# Altium PCB RLCD_SCH_28LED_v1p13p2.PcbDoc
Units mil, origin at the board's own origin, x right, y up, seen from the top; angles counter-clockwise.
Board outline 3898 x 1654 mil, 2 copper layers (Top, Bottom), stack 61.811 mil thick; 70 components, 76 nets, 264 pads, 83 vias.
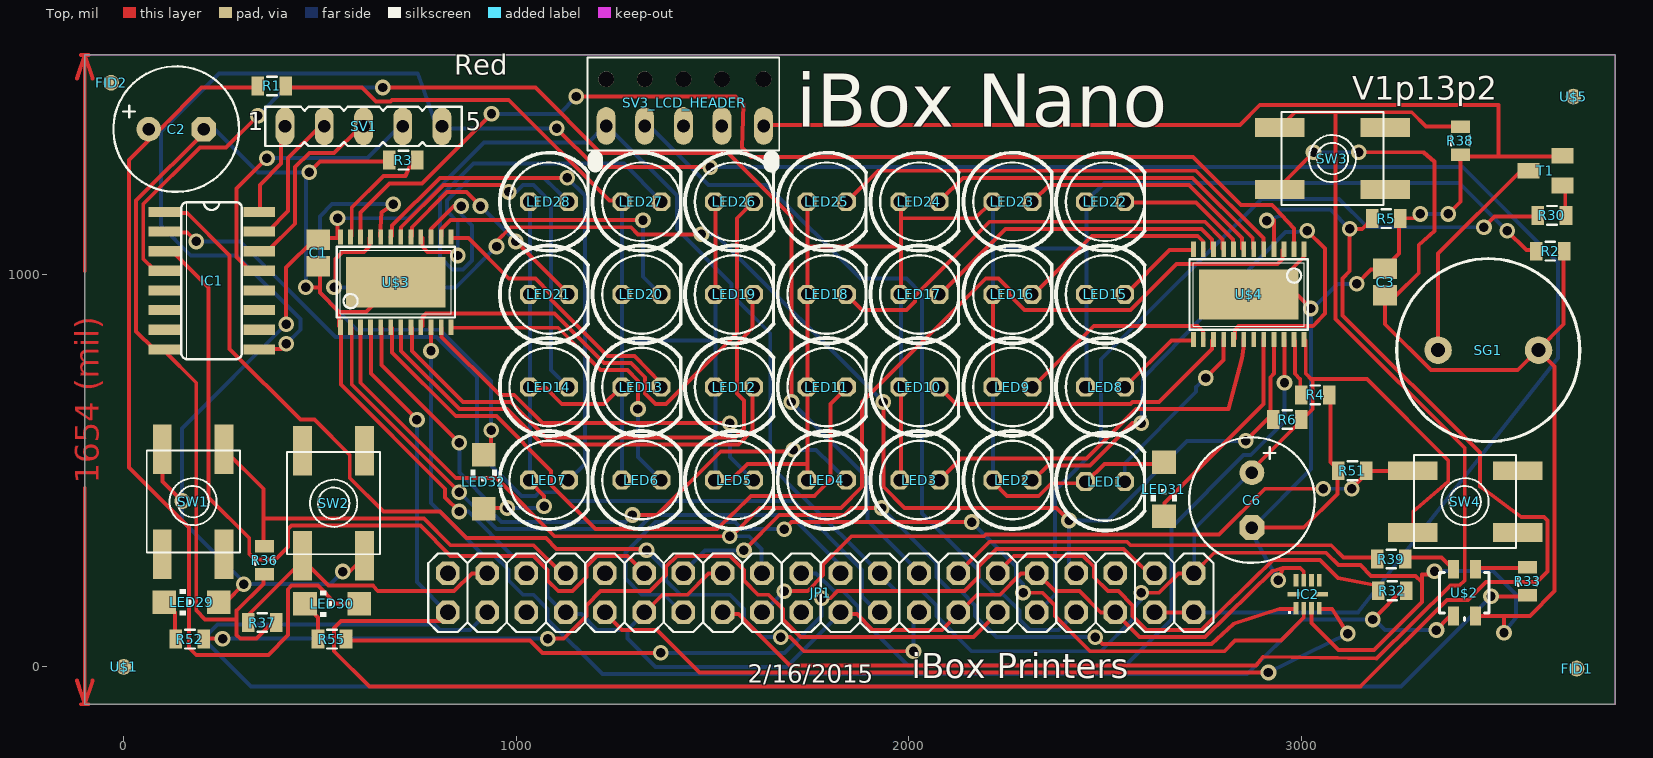
[diagram p0: Top view]
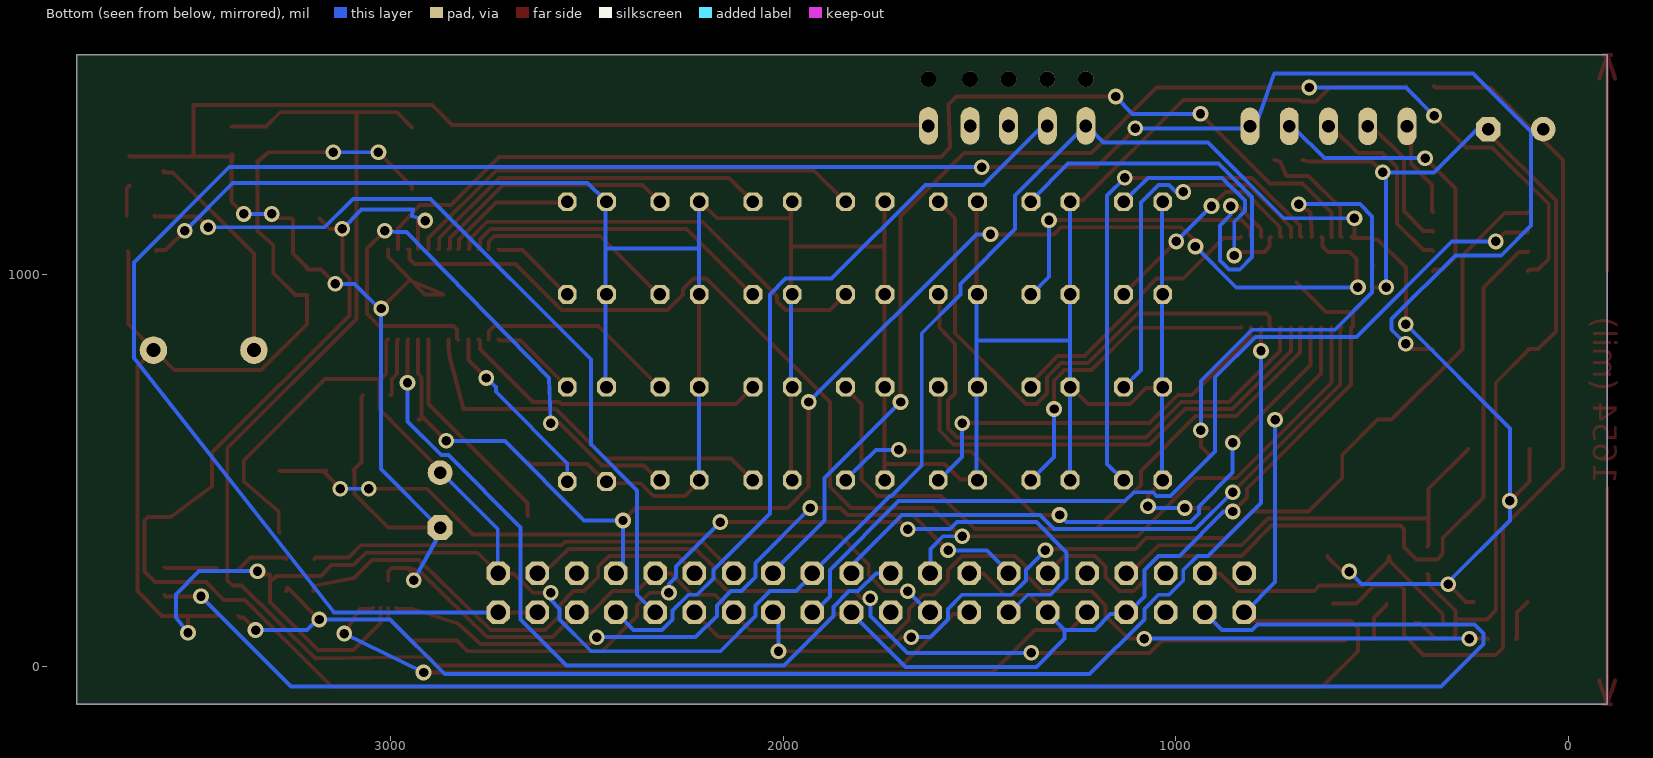
[diagram p1: Bottom view, seen from below]

## Layer stack, top to bottom
Top Solder: solder mask 0.4, Solder Resist, Dk 3.5
Top: signal copper 1.378
Dielectric 1: core 59.0551, FR-4, Dk 4.8
Bottom: signal copper 1.378
Bottom Solder: solder mask 0.4, Solder Resist, Dk 3.5

## Board outline
-99,-95 3799,-95 3799,1559 -99,1559

## Design rules (kind name [scope] priority, off if disabled: settings)
Clearance mdViaVia [IsVia vs IsVia] p1: gap=8
Clearance mdPadVia [IsPad vs IsVia] p2: gap=8
Clearance mdPadPad [IsPad vs IsPad] p3: gap=8
Clearance mdWireVia [(InLayerClass('Signal Layers') AND IsTrack) vs IsVia] p4: gap=8
Clearance mdWirePad [(InLayerClass('Signal Layers') AND IsTrack) vs IsPad] p5: gap=8
Clearance mdWireWire [(InLayerClass('Signal Layers') AND IsTrack) vs (InLayerClass('Signal Layers') AND IsTrack)] p6: gap=8
Clearance [All] p7: gap=8
HoleSize [All] p1: absolutevalues=TRUE maxlimit=100000 minlimit=24 maxpercent=80.000 minpercent=20.000
HoleToHoleClearance [All] p1: gap=8 allowstackedmicrovias=TRUE
PolygonConnect ThermalVias [IsVia] p1: connectstyle=Direct reliefconductorwidth=10 reliefentries=4 polygonreliefangle="90 Angle" airgapwidth=10
PolygonConnect [All] p2: connectstyle=Relief reliefconductorwidth=10 reliefentries=4 polygonreliefangle="90 Angle" airgapwidth=10
RoutingVias [All] p1: holewidth=28 width=50 viastyle="Through Hole" minholewidth=28 minwidth=50 maxholewidth=28 maxwidth=50
SilkToSilkClearance [All] p1 off: silktosilkclearance=10
SilkToSolderMaskClearance [IsPad] p1 off: minsilkscreentomaskgap=10 clearancetoexposedcopper=TRUE
SolderMaskExpansion [All] p1: expansion=4
Width [All] p1: maxlimit=100000 minlimit=10 preferedwidth=10
26 further rules are at their usual default settings.

## Components (designator, comment, footprint, x,y, rotation, side; value= is the part's Value field where it differs from the comment)
C1 "" C0805 496,1055 r270 top
C2 "" E3,5-8 134,1370 r0 top
C3 "" C0805 3213,980 r90 top
C6 "" E3,5-8 2874,425 r270 top
FID1 "" FIDUCIAL-1X2 3701,-4 r0 top
FID2 "" FIDUCIAL-1X2 -32,1488 r0 top
IC1 "" SO16 224,984 r270 top
IC2 "" QFN-10 3016,185 r90 top
JP1 "" 2X20 1776,189 r180 top
LED1 "" LED5MM 2500,472 r0 top
LED2 "" LED5MM 2264,476 r0 top
LED3 "" LED5MM 2027,476 r0 top
LED4 "" LED5MM 1791,476 r0 top
LED5 "" LED5MM 1555,476 r0 top
LED6 "" LED5MM 1319,476 r0 top
LED7 "" LED5MM 1083,476 r0 top
LED8 "" LED5MM 2500,713 r0 top
LED9 "" LED5MM 2264,713 r0 top
LED10 "" LED5MM 2027,713 r0 top
LED11 "" LED5MM 1791,713 r0 top
LED12 "" LED5MM 1555,713 r0 top
LED13 "" LED5MM 1319,713 r0 top
LED14 "" LED5MM 1083,713 r0 top
LED15 "" LED5MM 2500,949 r0 top
LED16 "" LED5MM 2264,949 r0 top
LED17 "" LED5MM 2027,949 r0 top
LED18 "" LED5MM 1791,949 r0 top
LED19 "" LED5MM 1555,949 r0 top
LED20 "" LED5MM 1319,949 r0 top
LED21 "" LED5MM 1083,949 r0 top
LED22 "" LED5MM 2500,1185 r0 top
LED23 "" LED5MM 2264,1185 r0 top
LED24 "" LED5MM 2027,1185 r0 top
LED25 "" LED5MM 1791,1185 r0 top
LED26 "" LED5MM 1555,1185 r0 top
LED27 "" LED5MM 1319,1185 r0 top
LED28 "" LED5MM 1083,1185 r0 top
LED29 "" CHIPLED_1206 173,165 r90 top
LED30 "" CHIPLED_1206 531,161 r90 top
LED31 "" CHIPLED_1206 2650,453 r180 top
LED32 "" CHIPLED_1206 917,472 r0 top
R1 "" 0805 378,1480 r180 top
R2 "" 0805 3634,1059 r0 top
R3 "" 0805 713,1291 r180 top
R4 "" 0805 3035,693 r0 top
R5 "" 0805 3216,1142 r180 top
R6 "" 0805 2964,630 r0 top
R30 "" 0805 3638,1150 r0 top
R32 "" 0805 3231,194 r0 top
R33 "" 0805 3576,218 r90 top
R36 "" 0805 359,272 r270 top
R37 "" 0805 353,113 r0 top
R38 "" 0805 3405,1341 r270 top
R39 "" 0805 3229,275 r0 top
R51 "" 0805 3130,500 r180 top
R52 "" 0805 169,71 r180 top
R55 "" 0805 531,71 r180 top
SG1 "" BUZZER-12MM 3476,807 r0 top
SV1 "" FE05-1 611,1377 r0 top
SV3_LCD_HEADER "" MDF7-5S-2.54DSA 1181,1315 r0 top
SW1 "" EVQ-Q2 177,421 r270 top
SW2 "" EVQ-Q2 535,417 r90 top
SW3 "" EVQ-Q2 3079,1295 r0 top
SW4 "" EVQ-Q2 3417,421 r0 top
T1 "" SOT23 3622,1264 r90 top
U$1 "" FIDUCIAL_1MM 0,0 r0 top
U$2 "" LED-TRICOLOR-SMD 3415,189 r0 top
U$3 "" TSSOP24 693,980 r0 top
U$4 "" TSSOP24 2866,949 r180 top
U$5 "" FIDUCIAL_1MM 3693,1453 r0 top

## Footprints (in the part's own frame and the unit in brackets; to place one, negate y for a bottom-side part, rotate by r counter-clockwise, add the part's x,y. Pads: shape width x height; smd on the part's side, far side on the other; paste and mask are expansions set on the pad)
2X20 [mil] "2X20"
  oct 60x60 hole 40: 1(-950,-50) 2(-950,50) 3(-850,-50) 4(-850,50) 5(-750,-50) 6(-750,50) 7(-650,-50) 8(-650,50) 9(-550,-50) 10(-550,50) 11(-450,-50) 12(-450,50) 13(-350,-50) 14(-350,50) 15(-250,-50) 16(-250,50) 17(-150,-50) 18(-150,50) 19(-50,-50) 20(-50,50) 21(50,-50) 22(50,50) 23(150,-50) 24(150,50) 25(250,-50) 26(250,50) 27(350,-50) 28(350,50) 29(450,-50) 30(450,50) 31(550,-50) 32(550,50) 33(650,-50) 34(650,50) 35(750,-50) 36(750,50) 37(850,-50) 38(850,50) 39(950,-50) 40(950,50)
  silkscreen extent -1000,-100 1000,100
0805 [mil] "0805"
  rect 32x48 smd: 1(-35.43,0) 2(36,0)
  silkscreen extent -12,-24 12,24
BUZZER-12MM [mil] "BUZZER-12MM"
  round 70 hole 36: +(128,0) -(-127.95,0)
  silkscreen extent -233,-233 233,233
C0805 [mil] "C0805"
  rect 52x60 smd: 1(-33.46,0) 2(34,0)
CHIPLED_1206 [mil] "CHIPLED_1206"
  rect 60x60 smd: A(0,-68.9) C(0,69)
  silkscreen extent -33,0 34,31
E3,5-8 [mil] "E3,5-8"
  round 63 hole 32: +(-70,0)
  oct 63x63 hole 32: -(70,0)
  silkscreen extent -160,-160 160,160
EVQ-Q2 [mil] "EVQ-Q2"
  rect 126x48 smd: A(-133.86,-78.74) A'(134,-78.74) B(-133.86,79) B'(134,79)
  silkscreen extent -130,-118 130,119
FE05-1 [mil] "FE05-1"
  oval 48x96 hole 32: 1(-200,0) 2(-100,0) 3(0,0) 4(100,0) 5(200,0)
  silkscreen extent -250,-50 250,50
FIDUCIAL-1X2 [mil] "FIDUCIAL-1X2"
  rrect100% 40x40 smd: 1(0,0)
FIDUCIAL_1MM [mil] "FIDUCIAL_1MM"
  rrect100% 40x40 smd: 1(0,0)
LED5MM [mil] "LED5MM"
  oct 48x48 hole 32: A(-50,0) K(50,0)
  silkscreen extent -125,-125 100,125
LED-TRICOLOR-SMD [mil] "LED-TRICOLOR-SMD"
  rect 28x48 smd: A(28,-59.06) B(28,60) G(-27.56,60) R(-27.56,-59.06)
  silkscreen extent -63,-71 63,52
MDF7-5S-2.54DSA [mil] "MDF7-5S-2.54DSA"
  oval 48x96 hole 32: 1(48,63) 2(146,63) 3(245,63) 4(343,63) 5(449,63)
  round 40 hole 40: 1(48,182) 1(146,182) 1(245,182) 1(343,182) 1(449,182)
  silkscreen extent 0,-35 489,237
QFN-10 [mil] "QFN-10"
  rect 32x12 smd: 1(-35.43,30) 2(-35.43,10) 3(-35.43,-9.84) 4(-35.43,-29.53) 6(36,-29.53) 7(36,-9.84) 8(36,10) 9(36,30)
  rect 12x32 smd: 5(0,-35.43) 10(0,36)
  silkscreen extent -50,43 -42,50
SO16 [mil] "SO16"
  rect 26x80 smd: 1(-175,-121) 2(-125,-121) 3(-75,-121) 4(-25,-121) 5(25,-121) 6(75,-121) 7(125,-121) 8(175,-121) 9(175,121) 10(125,121) 11(75,121) 12(25,121) 13(-25,121) 14(-75,121) 15(-125,121) 16(-175,121)
  silkscreen extent -200,-77 200,77
SOT23 [mil] "SOT23"
  rect 40x56 smd: 1(-37.4,-43.31) 2(38,-43.31) 3(0,44)
TSSOP24 [mil] "TSSOP24"
  rect 12x39 smd: 1(-140.75,-114.87) 2(-115.16,-114.87) 3(-89.57,-114.87) 4(-63.98,-114.87) 5(-38.39,-114.87) 6(-12.8,-114.87) 7(13,-114.87) 8(39,-114.87) 9(64,-114.87) 10(90,-114.87) 11(116,-114.87) 12(141,-114.87) 13(141,115) 14(116,115) 15(90,115) 16(64,115) 17(39,115) 18(13,115) 19(-12.8,115) 20(-38.39,115) 21(-63.98,115) 22(-89.57,115) 23(-115.16,115) 24(-140.75,115)
  rect 254x128 smd: P$100(0,0)
  silkscreen extent -150,-90 151,90

## Part data
C1 C3: library part C0805
C2 C6: library part E3,5-8
FID1 FID2: library part FIDUCIAL-1X2
IC1: library part SO16
IC2: library part QFN-10
JP1: library part 2X20
LED1 LED2 LED3 LED4 LED5 LED6 LED7 LED8 LED9 LED10 LED11 LED12 LED13 LED14 LED15 LED16 LED17 LED18 LED19 LED20 LED21 LED22 LED23 LED24 LED25 LED26 LED27 LED28: library part LED5MM
LED29 LED30 LED31 LED32: library part CHIPLED_1206
R1 R2 R3 R4 R5 R6 R30 R32 R33 R36 R37 R38 R39 R51 R52 R55: library part 0805
SG1: library part BUZZER-12MM
SV1: library part FE05-1
SV3_LCD_HEADER: library part MDF7-5S-2.54DSA
SW1 SW2 SW3 SW4: library part EVQ-Q2
T1: library part SOT23
U$1 U$5: library part FIDUCIAL_1MM
U$2: library part LED-TRICOLOR-SMD
U$3 U$4: library part TSSOP24

## Via types
v1: diameter 40/40 (per signal layer), hole 24, Top to Bottom, 83 vias

## Nets (pads, with @x,y where several pads share a name; then routed paths per layer and width w, separated by ;. In a path a pad name is that pad's centre, name@x,y a point inside that pad or via, vN(x,y) a via of type N, cw(c..) or ccw(c..) an arc to the next point about the centre after c; other vN are vias at no path point)
B1_LED_BLU_GPIO27: JP1.13 R39.1 | length 1120
  Top w10: JP1.13 2129,243 2205,319 2556,319 2565,310 3076,310 3107,279 3191,279 R39.1@3194,275
B1_LED_GRN_GPIO4: JP1.38 R33.1 | length 4272.8
  Top w10: v1(3483,180) 3573,180 R33.1@3576,183
  Bottom w10: JP1.38 923,135 882,94 806,94 792,108 239,108 216,85 216,58 324,-50 3254,-50 v1(3483,180)
B1_LED_RED_GPIO17: JP1.11 R32.1 | length 1205
  Top w10: JP1.11 2228,243 2268,283 2444,283 2471,256 2471,229 2507,193 2534,193 2570,157 2570,130 2606,94 2745,94 2928,273 3047,273 3093,227 3195,207 R32.1@3196,194
BUTTON_A_GPIO13: JP1.33 R36.1 SW1.B | length 1119.2
  Top w10: SW1.B@256,555 257,553 356,454 356,378 ; R36.1@359,307 356,310 356,378 ; JP1.33 1125,243 1112,243 1044,310 833,310 765,378 356,378
BUTTON_A_LED_GREEN_GPIO18: JP1.12 R52.1 | length 2281.4
  Top w10: R52.1@205,71 207,72 v1(252,72) ; v1(1080,72) 1121,72 1179,130 1179,157 1215,193 1341,193 1382,234 1382,256 1409,283 1544,283 1580,247 1580,220 1616,184 1643,184 1679,148 1679,121 1724,76 2165,76 2223,135 JP1.12
  Bottom w10: v1(252,72) v1(1080,72)
BUTTON_B_GPIO26: JP1.37 R37.1 SW2.B | length 758
  Top w10: R37.1@318,113 320,117 320,135 455,270 455,279 457,283 459,270 522,207 635,207 648,193 842,193 887,238 923,238 JP1.37
BUTTON_B_LED_BLU_GPIO2: JP1.3 R55.1 | length 2253.4
  Top w10: R55.1@567,71 567,67 1035,67 1067,36 v1(1368,36) ; v1(1778,175) 1800,175 1818,193 2142,193 2178,229 2178,256 2223,301 2547,301 2606,243 2624,243 JP1.3
  Bottom w10: v1(1368,36) 1683,36 1778,130 v1(1778,175)
BUTTON_C_GPIO7: JP1.26 R38.1 SW3.B | length 3860.5
  Top w10: JP1.26 1526,135 1566,135 1697,4 2885,4 2902,26 3191,22 3380,207 3402,207 3416,220 3416,558 3087,886 3087,1413 ; SW3.B@2945,1374 2948,1377 2984,1413 3087,1413 ; R38.1@3405,1376 3402,1377 3317,1377 3281,1413 3087,1413
BUTTON_D_GPIO11: JP1.24 R51.1 SW4.B | length 1830.1
  Top w10: v1(1683,193) 1742,193 1782,234 1782,261 1854,333 2192,333 2196,337 2790,337 2907,454 v1(3056,454) ; v1(3128,454) 3168,495 3165,500 3168,499 3281,499 SW4.B@3283,500
  Bottom w10: JP1.24 1629,139 v1(1683,193) ; v1(3056,454) v1(3128,454)
BUZZER_PIEZO_GPIO15: JP1.10 R30.1 | length 2037.1
  Top w10: v1(3465,1120) 3492,1147 3600,1147 R30.1@3602,1150
  Bottom w10: JP1.10 2327,139 2372,184 2372,450 2489,567 2489,783 2898,1192 3096,1192 3168,1120 v1(3465,1120)
GND-ISO: C1.2 C2.- C3.2 C6.- IC1.8 IC2.8 JP1.6 JP1.9 JP1.14 JP1.20 JP1.25 JP1.30 JP1.34 R3.2 R4.2 R5.1 R36.2 R37.2 R38.2 R51.2 SV3_LCD_HEADER.5 T1.2 U$3.1 U$3.P$100 U$4.1 U$4.P$100 | length 11316.9
  Top w10: C2.- 230,1368 212,1368 32,1188 32,855 77,810 99,810 IC1.8 104,805 185,724 185,144 207,121 288,121 ; R36.2@359,237 356,234 356,211 288,144 288,121 ; R37.2 387,112 378,112 338,72 297,72 288,81 288,121 ; v1(464,967) 500,967 ; v1(473,1260) 500,1287 662,1287 R3.2 ; C1.2@496,1022 500,1021 500,967 ; U$3.P$100 689,976 617,904 549,904 ; v1(855,396) 819,432 819,454 554,720 554,864 552,865 549,868 549,904 ; JP1.30 1328,139 1373,184 1436,184 1490,238 1521,238 JP1.25 ; SV3_LCD_HEADER.5 1634,1381 2844,1381 2894,1431 3411,1431 3502,1431 3502,1300 ; JP1.20 1827,135 1868,135 1908,94 2084,94 2124,135 JP1.14 2129,139 2174,184 2232,184 2286,238 2322,238 JP1.9 2327,238 2372,193 2435,193 2489,139 2525,139 JP1.6 2529,135 2588,76 2754,76 2926,244 2953,252 ; C6.- 2876,355 3006,355 3092,441 3092,499 R51.2 3092,504 3074,522 3074,688 R4.2 ; v1(2941,221) 2953,252 ; IC2.8@3006,220 3006,243 2997,252 2953,252 ; U$4.1@3007,1064 3006,1062 3006,1044 2912,949 2867,949 U$4.P$100 2952,985 v1(3024,913) ; v1(3141,976) 3177,1012 3209,1012 C3.2 3213,1017 3249,1053 3249,1138 3252,1142 3254,1143 3293,1143 v1(3303,1154) ; v1(3374,1154) 3405,1185 R38.2 ; R38.2@3402,1291 3402,1305 R38.2 ; T1.2@3665,1301 3663,1300 3502,1300 ; 500,967 500,954 549,904 ; R38.2 3407,1300 3502,1300
  Bottom w10: C2.- 234,1368 342,1260 v1(473,1260) 464,1255 v1(464,967) ; v1(855,396) 878,396 990,283 1044,283 1080,247 1080,180 1121,139 JP1.34 1130,135 1166,135 1206,94 1283,94 ; JP1.30 1323,135 1283,94 ; JP1.20 1823,135 1688,0 1355,0 1283,72 1283,94 ; v1(2941,221) 2876,337 2876,351 C6.- 2876,355 3024,504 v1(3024,913) 3029,913 3092,976 v1(3141,976) ; v1(3303,1154) v1(3374,1154)
LCD_DATA_TX0_GPIO14: JP1.8 SV3_LCD_HEADER.2 | length 2002.5
  Bottom w10: SV3_LCD_HEADER.2 1328,1377 1341,1377 1490,1228 1638,1228 1877,990 1994,990 2034,949 2034,391 2178,247 2178,225 2219,184 2241,184 2282,144 2282,121 2309,94 2381,94 2421,135 JP1.8
LED+: LED1.A LED2.A LED3.A LED4.A LED5.A LED6.A LED7.A LED8.A LED9.A LED10.A LED11.A LED12.A LED13.A LED14.A LED15.A LED16.A LED17.A LED18.A LED19.A LED20.A LED21.A LED22.A LED23.A LED24.A LED25.A LED26.A LED27.A LED28.A LED31.A LED32.A R1.1 R2.1 | length 9207.4
  Top w10: R1.1@413,1480 414,1476 607,1476 643,1440 680,1440 684,1444 981,1444 1238,1188 1265,1188 LED27.A ; LED32.A@917,404 918,405 v1(977,405) ; LED7.A 1035,472 1071,436 v1(1071,409) ; LED14.A 1035,711 1076,711 1116,670 1224,670 1265,711 LED13.A ; LED5.A 1508,477 1548,477 1589,517 1742,517 ; LED19.A 1508,949 1508,1183 LED26.A ; LED4.A 1742,477 1742,517 ; LED25.A 1742,1183 1742,1071 ; LED3.A 1980,477 1980,711 LED10.A ; LED17.A 1980,949 1980,1071 ; LED24.A 1980,1183 1980,1143 ; LED2.A 2214,472 2250,436 2331,436 2363,468 2448,468 LED1.A 2453,472 2498,517 2646,517 LED31.A@2650,522 ; LED9.A 2214,715 2214,945 LED16.A ; LED23.A 2210,1183 2169,1143 1980,1143 ; v1(3524,1111) 3573,1062 3596,1062 R2.1@3598,1059 ; 1742,517 1742,711 LED11.A 1742,715 1742,945 LED18.A 1742,954 1742,1071 ; 1742,1071 1980,1071 ; 1980,1071 1980,1143
  Bottom w10: v1(977,405) 1067,405 v1(1071,409) ; LED7.A 1035,477 1035,711 LED14.A 1035,715 1035,945 LED21.A 1035,949 1035,1183 LED28.A ; LED6.A 1269,477 1269,711 LED13.A 1269,715 1269,832 ; LED27.A 1269,1183 1269,954 LED20.A 1269,945 1269,832 ; LED5.A 1508,477 1508,711 LED12.A 1508,715 1508,832 ; LED19.A 1508,945 1508,832 ; LED10.A 1980,715 1980,945 LED17.A ; LED2.A 2214,477 2214,711 LED9.A ; LED16.A 2214,1066 ; LED23.A 2214,1183 2214,1066 ; LED8.A 2453,715 2453,945 LED15.A 2453,949 2453,1066 ; v1(3524,1111) 3402,1233 2498,1233 2453,1188 LED22.A 2453,1183 2453,1066 ; 1269,832 1508,832 ; 2214,1066 2453,1066
N$1: LED2.K U$4.17 | length 1530.6
  Top w10: LED2.K 2318,477 2354,513 2462,513 2570,621 v1(2592,621) ; U$4.17@2828,834 2831,837 2831,859 2840,868 3029,868 3060,900 3060,1066 v1(3015,1111)
  Bottom w10: v1(2592,621) 2596,736 2960,1108 2987,1108 v1(3015,1111)
N$2: LED3.K U$4.18 | length 993.8
  Top w10: LED3.K 2079,477 2133,531 2453,531 2579,657 2814,657 2849,786 2853,813 U$4.18
N$3: LED6.K U$3.12 | length 809.5
  Top w10: U$3.12@834,865 837,864 1107,864 1215,756 1283,756 1310,729 v1(1310,657)
  Bottom w10: v1(1310,657) 1310,535 1368,477 LED6.K
N$4: LED4.K U$3.5 | length 1611.1
  Top w10: U$3.5@654,865 657,864 657,769 v1(855,571) ; v1(1296,387) 1359,387 1521,549 1701,549 v1(1706,553)
  Bottom w10: v1(855,571) 855,495 941,409 941,391 963,369 1278,369 v1(1296,387) ; v1(1706,553) 1764,553 1841,477 LED4.K
N$5: LED5.K U$3.11 | length 1021.3
  Top w10: U$3.11@808,865 810,864 810,841 959,693 995,693 1067,621 v1(1544,621)
  Bottom w10: v1(1544,621) 1544,535 1602,477 LED5.K
N$6: LED22.K U$4.8 | length 341.6
  Top w10: LED22.K 2552,1183 2732,1183 2826,1089 2826,1066 U$4.8@2828,1064
N$7: LED15.K U$4.12 | length 222.9
  Top w10: LED15.K 2552,949 2664,1062 2723,1062 U$4.12@2725,1064
N$8: R3.1 U$3.23 | length 300.7
  Top w10: U$3.23@578,1095 581,1098 581,1170 662,1251 718,1251 734,1287 R3.1@748,1291
N$9: LED16.K U$4.11 | length 524
  Top w10: LED16.K 2318,949 2466,1098 2736,1098 2750,1084 2750,1066 U$4.11@2751,1064
N$10: LED17.K U$4.10 | length 802.8
  Top w10: LED17.K 2079,949 2246,1116 2745,1116 2772,1089 2772,1066 U$4.10@2776,1064
N$11: LED18.K U$4.9 | length 1121.2
  Top w10: LED18.K 1845,945 1881,909 1994,909 2016,931 2016,945 2205,1134 2754,1134 2799,1089 2799,1066 U$4.9@2802,1064
N$12: R4.1 U$4.23 | length 150.7
  Top w10: U$4.23@2981,834 2984,832 2984,747 2997,733 2997,693 R4.1@3000,693
N$13: LED19.K U$3.8 | length 1374.9
  Top w10: U$3.8@731,865 734,864 734,805 864,675 986,675 1076,585 1557,585 1580,607 1580,679 1562,697 1562,823 1602,864 1602,945 LED19.K
N$14: LED11.K U$3.6 | length 1695.8
  Top w10: U$3.6@680,865 684,864 684,801 846,639 950,639 1089,499 1089,463 1202,351 1512,351 1598,436 1760,436 1800,477 1800,670 1841,711 LED11.K
N$15: LED9.K U$4.14 | length 526.1
  Top w10: LED9.K 2318,715 2471,868 2736,868 2750,855 2750,837 U$4.14@2751,834
N$16: LED10.K U$4.15 | length 797.3
  Top w10: LED10.K 2079,711 2120,670 2565,670 2570,675 2637,675 2772,810 2772,832 U$4.15
N$17: LED20.K U$3.14 | length 752.1
  Top w10: U$3.14@808,1095 810,1098 810,1116 833,1138 v1(1323,1138)
  Bottom w10: v1(1323,1138) 1323,994 1368,949 LED20.K
N$18: LED12.K U$3.7 | length 1180.5
  Top w10: U$3.7@706,865 707,864 707,805 855,657 977,657 1067,567 1566,567 1602,603 1602,711 LED12.K
N$19: R39.2 U$2.G | length 138.3
  Top w10: R39.2 3267,279 3357,279 3384,252 U$2.G@3388,248
N$20: LED14.K U$3.18 | length 974
  Top w10: U$3.18 707,1098 707,1120 815,1228 963,1228 v1(981,1210)
  Bottom w10: v1(981,1210) 999,1210 1017,1228 1044,1228 1089,1183 1089,756 1130,715 LED14.K
N$21: LED21.K U$3.17 | length 572.6
  Top w10: U$3.17@731,1095 734,1098 734,1120 824,1210 873,1210 v1(909,1174) ; v1(999,1084) 1134,949 LED21.K
  Bottom w10: v1(909,1174) v1(999,1084)
N$23: LED23.K U$4.7 | length 640
  Top w10: LED23.K 2318,1188 2358,1228 2714,1228 2849,1093 2849,1066 U$4.7@2853,1064
N$24: LED24.K U$4.6 | length 918.3
  Top w10: LED24.K 2079,1188 2138,1246 2723,1246 2876,1093 2876,1066 U$4.6@2879,1064
N$25: LED25.K U$4.5 | length 1194.3
  Top w10: LED25.K 1845,1188 1922,1264 2732,1264 2903,1093 2903,1066 U$4.5@2904,1064
N$26: LED26.K U$3.9 | length 1379.7
  Top w10: U$3.9@757,865 761,868 761,891 770,900 1098,900 1224,774 1292,774 1328,738 1328,697 1355,670 1382,670 1562,850 1562,1143 1602,1183 LED26.K
N$27: LED27.K U$3.15 | length 1168.5
  Top w10: U$3.15@782,1095 783,1098 783,1116 842,1174 v1(860,1174)
  Bottom w10: v1(860,1174) 860,1152 887,1125 887,1035 864,1012 837,1012 806,1044 806,1197 891,1282 1274,1282 1368,1188 LED27.K
N$28: LED28.K U$3.16 | length 635.5
  Top w10: U$3.16 761,1093 761,1071 774,1057 842,1057 v1(851,1048)
  Bottom w10: v1(851,1048) 851,1134 824,1161 824,1188 882,1246 1071,1246 1130,1188 LED28.K
N$29: LED13.K U$3.13 | length 706.9
  Top w10: U$3.13 837,1093 878,1093 981,990 1049,990 1089,949 1089,936 1233,792 1301,792 1368,724 1368,715 LED13.K
N$30: R30.2 T1.1 | length 79.2
  Top w10: T1.1@3665,1226 3668,1224 3672,1219 3672,1152 R30.2@3673,1150
N$31: IC1.13 SV1.4 | length 733.5
  Top w10: IC1.13 342,1012 320,1012 288,1044 288,1219 v1(365,1296)
  Bottom w10: v1(365,1296) 621,1296 698,1372 SV1.4
N$33: SG1.- T1.3 | length 565.9
  Top w10: SG1.- 3348,810 3348,1053 3555,1260 3578,1260 T1.3@3579,1264
N$34: 
N$36: LED7.K U$3.19 | length 1334.2
  Top w10: U$3.19@680,1095 684,1098 684,1125 806,1246 v1(1130,1246)
  Bottom w10: v1(1130,1246) 1175,1201 1175,517 1134,477 LED7.K
N$37: R33.2 U$2.B | length 137.6
  Top w10: U$2.B@3443,248 3443,252 3573,252 R33.2
N$38: IC1.14 SV1.3 | length 481.1
  Top w10: IC1.14 347,1062 369,1062 437,1129 437,1273 473,1309 536,1309 599,1372 SV1.3
N$39: LED29.C R52.2 | length 107.7
  Top w10: LED29.C 108,162 131,139 131,72 R52.2@134,71
N$40: LED30.C R55.2 | length 103.4
  Top w10: LED30.C@463,161 464,157 495,126 495,72 R55.2@496,71
N$41: LED8.K U$4.13 | length 225.1
  Top w10: LED8.K 2552,715 2669,832 2723,832 U$4.13
N$46: 
N$47: LED1.K U$4.16 | length 466.4
  Top w10: v1(2756,736) 2802,782 U$4.16
  Bottom w10: LED1.K 2550,518 2732,701 2732,713 v1(2756,736)
N$58: IC1.16 SV1.1 | length 247.4
  Top w10: IC1.16 347,1161 347,1228 401,1282 401,1372 SV1.1
N$59: IC1.15 SV1.2 | length 354.8
  Top w10: IC1.15 347,1111 369,1111 419,1161 419,1296 495,1372 SV1.2
SDO_1: U$3.22 U$4.2 | length 2825.7
  Top w10: U$3.22@603,1095 603,1158 677,1232 760,1232 v1(937,1409) ; v1(1153,1453) 1559,1453 1579,1433 1575,1323 1598,1299 2724,1299 2846,1177 2925,1177 2933,1169 2981,1117 U$4.2@2981,1064
  Bottom w10: v1(937,1409) 1110,1409 v1(1153,1453)
SI1145_INT: IC2.4 JP1.32 | length 2087.4
  Top w10: JP1.32 1229,135 1269,94 1359,94 1467,-14 v1(2916,-14) ; IC2.4@3045,150 3047,148 3078,148 v1(3118,85)
  Bottom w10: v1(2916,-14) v1(3118,85)
SI1145_SCL: IC2.2 JP1.28 | length 2266.1
  Top w10: v1(1683,351) 1701,369 v1(2160,369) ; v1(2291,189) 2340,189 2372,157 2372,130 2462,40 2804,40 2831,67 2948,67 3006,126 3006,148 IC2.2@3006,150
  Bottom w10: JP1.28 1422,139 1377,184 1319,184 1278,225 1278,292 1355,369 1557,369 1575,351 v1(1683,351) ; v1(2160,369) 2273,256 2273,229 2291,211 v1(2291,189)
SI1145_SDA: IC2.1 JP1.27 | length 1838.4
  Top w10: v1(1580,297) 1670,387 1836,387 1854,405 v1(1931,405) ; v1(2475,76) 2493,58 2771,58 2827,110 2945,148 2984,148 IC2.1@2986,150
  Bottom w10: JP1.27 1427,243 1481,297 v1(1580,297) ; v1(1931,405) 2070,265 2070,229 2106,193 2133,193 2169,157 2169,130 2223,76 v1(2475,76)
ST1642_CLK: JP1.23 U$3.3 U$4.3 | length 3330.1
  Top w10: U$3.3@603,865 603,864 603,724 846,481 950,481 1098,333 v1(1544,333) 1548,333 1620,405 1827,405 1881,459 1881,675 2196,990 2228,990 2255,963 2255,949 2295,909 2565,909 2682,1026 2939,1026 2952,1039 2952,1062 U$4.3@2956,1064
  Bottom w10: v1(1544,333) 1593,333 1625,301 1625,243 JP1.23
ST1642_LE: JP1.40 R5.2 U$3.4 U$4.4 | length 5978.5
  Top w10: U$3.4@629,865 630,864 630,747 v1(747,630) ; JP1.40 824,135 806,117 554,117 536,99 536,40 626,-50 3150,-50 3371,171 3425,171 3470,216 3600,216 3627,243 3627,373 3618,382 3560,382 3455,460 3455,546 3105,895 3105,990 3123,1008 v1(3123,1116) 3155,1116 3177,1138 R5.2@3181,1142 ; v1(2912,1137) 2930,1138 2930,1066 U$4.4@2930,1064
  Bottom w10: v1(747,630) 747,216 824,139 JP1.40 ; v1(2912,1137) 2946,1149 2943,1165 3074,1165 v1(3123,1116)
ST1642_PWCLK: JP1.7 R6.1 U$3.21 U$4.21 | length 3562.4
  Top w10: v1(536,967) 540,972 540,1039 558,1057 612,1057 626,1071 626,1093 U$3.21 ; v1(950,1071) 950,1084 986,1120 1292,1120 1310,1102 v1(1472,1102) ; v1(1935,675) 1935,459 1989,405 2376,405 v1(2408,373) ; v1(2858,576) 2916,634 2929,630 2925,630 2921,634 2921,738 2930,747 2930,832 U$4.21
  Bottom w10: v1(536,967) 846,967 v1(950,1071) ; v1(1472,1102) 1508,1102 v1(1935,675) ; JP1.7 2421,243 2408,256 v1(2408,373) 2507,373 2709,576 v1(2858,576)
ST1642_SDI: JP1.19 U$3.2 | length 1632.1
  Top w10: U$3.2@578,865 581,864 581,720 v1(855,445)
  Bottom w10: v1(855,445) 950,351 1310,351 1346,387 1697,387 1823,261 1823,243 JP1.19
ST1642_SDO: JP1.21 U$4.22 | length 1945.2
  Top w10: U$4.22@2956,834 2957,832 v1(2957,724)
  Bottom w10: JP1.21 1728,238 1764,238 1809,193 1832,193 1872,153 1872,130 1998,4 2552,4 2669,121 2669,355 2853,540 2871,540 2957,625 v1(2957,724)
STEPPER_ENABLE_GPIO25: JP1.22
U3_OUT10: R32.2 U$2.R U$3.10 | length 3471.1
  Top w10: U$3.10@782,865 783,864 v1(783,805) ; v1(3182,121) 3263,202 R32.2@3266,194 ; v1(3344,94) 3375,126 3384,126 U$2.R@3388,130
  Bottom w10: v1(783,805) 783,418 918,283 945,283 981,247 981,220 1017,184 1044,184 1080,148 1080,121 1220,-18 2862,-18 3002,121 v1(3182,121) 3186,121 3213,94 v1(3344,94)
U3_OUT15: LED32.C U$3.20 | length 1218.6
  Top w10: U$3.20@654,1095 653,1098 657,1158 v1(687,1179) ; LED32.C 918,544 936,562 v1(936,603)
  Bottom w10: v1(687,1179) 531,1179 500,1147 500,954 594,859 806,859 936,729 v1(936,603)
U4_OUT14: U$4.19
U4_OUT15: LED31.C U$4.20 | length 554.8
  Top w10: LED31.C 2651,387 2651,418 2903,670 2903,832 U$4.20@2904,834
ULN2003_GPIO23_STP_IN1: IC1.1 JP1.16 | length 2683.3
  Top w10: IC1.1 104,1156 162,1156 270,1048 270,810 450,630 486,630 576,540 576,481 662,396 806,396 873,328 1076,328 1103,301 1328,301 v1(1332,297) ; v1(1674,76) 1697,76 1733,40 v1(2012,40)
  Bottom w10: v1(1332,297) 1382,247 1382,220 1418,184 1544,184 1580,148 1580,121 1625,76 v1(1674,76) ; v1(2012,40) 2012,121 2025,135 JP1.16
ULN2003_GPIO24_STP_IN2: IC1.2 JP1.18 | length 2382.6
  Top w10: IC1.2 104,1107 162,1107 v1(185,1084)
  Bottom w10: v1(185,1084) 297,1084 540,841 797,841 900,738 900,549 1013,436 1049,436 1058,445 1107,445 1130,423 1706,423 1881,247 1881,180 1922,139 JP1.18
ULN2003_IN4: IC1.4 JP1.15 | length 3158.1
  Top w10: IC1.4 99,1012 77,1012 50,1039 50,1179 194,1323 261,1323 v1(342,1404) ; v1(660,1476) 1049,1476 1215,1309 1539,1309 1701,1147 v1(1701,675)
  Bottom w10: v1(342,1404) 414,1476 v1(660,1476) ; v1(1701,675) 1895,481 1895,373 2025,243 JP1.15
ULN2003_STEPPER_IN3: IC1.3 JP1.29 | length 2104.3
  Top w10: IC1.3 104,1057 126,1057 216,967 216,432 320,328 320,288 333,274 387,274 419,306 419,351 428,360 756,360 833,283 1044,283 1080,247 1080,220 1107,193 1143,193 1179,229 1179,256 1206,283 1283,283 1323,243 JP1.29
UV_LED_CTRL_GPIO19: JP1.35
VDD: C1.1 C3.1 C6.+ IC2.3 JP1.1 JP1.17 LED29.A R2.2 R6.2 SG1.+ SV3_LCD_HEADER.1@1229,1378 SW1.A SW2.A SW3.A SW4.A U$2.A U$3.24 U$4.24 | length 10442.3
  Top w10: SW1.A@98,555 99,553 99,472 v1(149,423) ; LED29.A@242,165 243,166 261,166 v1(306,211) ; v1(414,873) 414,1017 486,1089 491,1089 496,1089 500,1089 504,1093 545,1093 ; v1(545,1143) 545,1093 ; U$3.24@552,1095 549,1093 545,1093 ; v1(558,243) 576,243 612,279 SW2.A@614,283 ; v1(2592,189) 2637,189 2687,238 2723,238 JP1.1 2778,291 3063,291 3094,260 3150,260 3177,232 3291,232 3307,217 ; C6.+ 2871,499 2997,625 R6.2 3002,630 3029,657 3029,729 3027,731 ; SW3.A@2945,1217 2945,1224 v1(3031,1311) ; U$4.24@3007,834 3011,832 3011,747 3027,731 ; IC2.3@3026,150 3026,112 3094,43 3185,43 3307,165 3307,217 ; v1(3146,1311) 3311,1311 3339,1287 3339,1110 3299,1075 3299,1004 3242,947 3213,947 3213,945 3213,873 3330,756 3551,756 3600,805 SG1.+ ; SW4.A@3283,343 3285,346 3285,396 3374,472 3374,526 3167,733 3029,733 3027,731 ; v1(3339,244) 3331,236 3307,236 3307,217 ; U$2.A@3443,130 3516,130 ; v1(3516,87) 3516,130 ; R2.2@3669,1059 3668,1057 3668,873 3605,810 SG1.+ ; 3516,130 3582,130 3645,193 3645,765 3605,805 SG1.+
  Bottom w10: v1(414,873) 149,607 v1(149,423) 149,373 306,216 v1(306,211) 527,211 v1(558,243) ; v1(545,1143) 725,1143 918,1336 1184,1336 1224,1377 1228,1378 1233,1377 1409,1201 1409,1116 1548,976 1548,949 1647,850 1647,513 1724,436 1728,436 1922,243 JP1.17 1926,234 1967,193 2034,193 2070,157 2070,130 2160,40 2489,40 2570,121 2570,148 2592,171 v1(2592,189) ; JP1.1 2727,243 2727,351 2871,495 C6.+ ; v1(3031,1311) v1(3146,1311) ; v1(3339,244) 3488,244 3547,185 3547,126 v1(3516,87)
VSS: C2.+ IC1.9 JP1.2 JP1.4 LED30.A R1.2 SV1.5 | length 8738
  Top w10: R1.2 338,1476 198,1476 95,1372 C2.+ 90,1368 14,1291 14,508 167,355 167,49 185,31 369,31 419,81 419,198 428,207 495,207 540,162 599,162 LED30.A@600,161 ; IC1.9 347,810 401,810 v1(414,823) ; v1(1103,1372) 1202,1273 v1(1494,1273) ; JP1.4 2628,139 2723,139 JP1.2
  Bottom w10: v1(414,823) 450,859 450,886 288,1048 171,1048 95,1125 95,1368 C2.+ 99,1368 243,1512 749,1512 797,1377 SV1.5 801,1372 v1(1103,1372) ; v1(1494,1273) 3411,1273 3654,1030 3654,787 3144,139 2727,139 JP1.2
pads on no net: FID1.1 FID2.1 IC1.5 IC1.6 IC1.7 IC1.10 IC1.11 IC1.12 IC2.5 IC2.6 IC2.7 IC2.9 IC2.10 JP1.5 JP1.31 JP1.36 JP1.39 SV3_LCD_HEADER.1@1229,1497 SV3_LCD_HEADER.1@1327,1497 SV3_LCD_HEADER.1@1426,1497 SV3_LCD_HEADER.1@1524,1497 SV3_LCD_HEADER.1@1630,1497 SV3_LCD_HEADER.3 SV3_LCD_HEADER.4 SW1.A' SW1.B' SW2.A' SW2.B' SW3.A' SW3.B' SW4.A' SW4.B' U$1.1 U$5.1
copper on no net: | length 1395.2
  Top w10: -119,-35 -99,-95 ; -119,1499 -99,1559 ; -109,-95 -89,-95 ; -109,1559 -89,1559 ; -99,456.08 -99,-95 ; -99,1007.92 -99,1559 ; -79,-35 -99,-95 ; -79,1499 -99,1559

## Keep-outs
Keep-Out Layer:
  the board outline again, w0

## Other copper
Top:
  text "1654 (mil)" at -63.01,466.08 h60 r90

## Silkscreen, mask and mechanical layers (free items; w line width, h text height)
Top Overlay:
  text "Red" at 842,1492 h86.8
  text "V1p13p2" at 3130,1425 h102.3
  text "iBox Nano" at 1713,1331 h232.5
  text "iBox Printers" at 2008,-51 h108.5
  text "2/16/2015" at 1590,-55 h77.5
Dimension:
  the board outline again, w0
tValues:
  text "GND" at 1705,1429 h62 r90
  text "DATA" at 1390,1413 h62 r90
  text "VDD" at 1291,1409 h62 r90
tSilk:
  text "1" at 3535,236 h108.5
_tsilk:
  text "iBox Nano" at 1713,1331 h232.5
_tNames:
  text "C2" at 291,1480 h77.5
  text "SV1" at 350,1442 h77.5
  text "SW3" at 2961,1433 h77.5
  text "R1" at 385.45,1432.03 h24.8
  text "R38" at 3453.71,1333.01 h24.8 r90
  text "R3" at 705.4,1243.29 h24.8
  text "LED28" at 1208,1206 h77.5
  text "LED27" at 1444,1206 h77.5
  text "LED26" at 1680,1206 h77.5
  text "LED25" at 1916,1206 h77.5
  text "LED24" at 2152,1206 h77.5
  text "LED23" at 2389,1206 h77.5
  text "LED22" at 2625,1206 h77.5
  text "IC1" at 154,1199 h77.5
  text "T1" at 3547,1189 h77.5 r90
  text "R30" at 3608,1182 h24.8
  text "R5" at 3220.28,1093.37 h24.8
  text "R2" at 3604,1092 h24.8
  text "C1" at 585.67,1017.58 h77.5 r90
  text "LED21" at 1208,970 h77.5
  text "LED20" at 1444,970 h77.5
  text "LED19" at 1680,970 h77.5
  text "LED18" at 1916,970 h77.5
  text "LED17" at 2152,970 h77.5
  text "LED16" at 2389,970 h77.5
  text "LED15" at 2625,970 h77.5
  text "C3" at 3173,945 h77.5 r90
  text "U$4" at 3068.63,936.26 h62 r90
  text "SG1" at 3376,907 h37.2
  text "U$3" at 528,898 h62 r90
  text "LED14" at 1208,734 h77.5
  text "LED13" at 1444,734 h77.5
  text "LED12" at 1680,734 h77.5
  text "LED11" at 1916,734 h77.5
  text "LED10" at 2152,734 h77.5
  text "LED9" at 2389,734 h77.5
  text "LED8" at 2625,734 h77.5
  text "R4" at 3005,725 h24.8
  text "R6" at 2934,662 h24.8
  text "SW4" at 3299,559 h77.5
  text "LED7" at 1208,497 h77.5
  text "LED6" at 1444,497 h77.5
  text "LED5" at 1680,497 h77.5
  text "LED4" at 1916,497 h77.5
  text "LED3" at 2152,497 h77.5
  text "LED2" at 2389,497 h77.5
  text "LED1" at 2625,493 h77.5
  text "R51" at 3125.1,451.29 h24.8
  text "LED32" at 867,422 h77.5 r90
  text "SW1" at 364.67,404.58 h77.5 r90
  text "LED31" at 2749.06,308.78 h77.5 r90
  text "R39" at 3199,307 h24.8
  text "SW2" at 398,299 h77.5 r90
  text "R36" at 407.71,264.05 h24.8 r90
  text "R32" at 3201,226 h24.8
  text "C6" at 3033.67,213.05 h77.5 r90
  text "U$2" at 3375,194 h24.8
  text "R33" at 3544,188 h24.8 r90
  text "R37" at 323,145 h24.8
  text "IC2" at 2957,136 h77.5 r90
  text "LED29" at 19.11,65.94 h77.5
  text "LED30" at 377.41,61.94 h77.5
  text "R52" at 161.2,22.29 h24.8
  text "R55" at 522.93,22.37 h24.8
  text "JP1" at 2670.84,14.94 h77.5

## Dimensions
-99,-95 to 3799,-95 on Top
2791,139 to 2803,1559 on Measures
3391,139 to 3390,1559 on Measures
3391,139 to 2720,138 on Measures
-99,1559 to 788,1444 on Measures
-99,1559 to 788,1444 on Measures
-99,-95 to 1791,713 on Measures
-99,1559 to 1791,713 on Measures
3799,-95 to 3387,139 on Measures
3799,-95 to 3393,139 on Measures
3799,1559 to 1429,1378 on Measures
3799,1559 to 3079,1295 on Measures
3799,1559 to 3079,1295 on Measures
3799,-95 to 3417,421 on Measures
3799,1559 to 3417,421 on Measures
3799,1559 to 3417,421 on Measures
-99,-95 to 535,417 on Measures
-99,-95 to 177,421 on Measures
-99,1559 to 177,421 on Measures

## Text inside footprints (layer, text, board x,y; h text height)
C1: tValues ">VALUE" at 406,1090 h77.5 r270; tNames ">NAME" at 536,1090 h77.5 r270
C2: tValues ">VALUE" at 44,1250 h77.5; tNames ">NAME" at 264,1480 h77.5
C3: tValues ">VALUE" at 3303,945 h77.5 r90; tNames ">NAME" at 3173,945 h77.5 r90
C6: tValues ">VALUE" at 2754,515 h77.5 r270; tNames ">NAME" at 2984,295 h77.5 r270
IC1: tValues ">VALUE" at 199,1144 h77.5 r270; tNames ">NAME" at 154,1199 h77.5
IC2: tValues ">VALUE" at 3134.11,135.79 h77.5 r90; tNames ">NAME" at 2956,135.79 h77.5 r90
JP1: tValues ">VALUE" at 2776,364 h77.5 r180; tNames ">NAME" at 2776,64 h77.5 r180
LED1: tValues ">VALUE" at 2626,401 h77.5; tNames ">NAME" at 2625,493 h77.5
LED2: tValues ">VALUE" at 2390,405 h77.5; tNames ">NAME" at 2389,497 h77.5
LED3: tValues ">VALUE" at 2153,405 h77.5; tNames ">NAME" at 2152,497 h77.5
LED4: tValues ">VALUE" at 1917,405 h77.5; tNames ">NAME" at 1916,497 h77.5
LED5: tValues ">VALUE" at 1681,405 h77.5; tNames ">NAME" at 1680,497 h77.5
LED6: tValues ">VALUE" at 1445,405 h77.5; tNames ">NAME" at 1444,497 h77.5
LED7: tValues ">VALUE" at 1209,405 h77.5; tNames ">NAME" at 1208,497 h77.5
LED8: tValues ">VALUE" at 2626,642 h77.5; tNames ">NAME" at 2625,734 h77.5
LED9: tValues ">VALUE" at 2390,642 h77.5; tNames ">NAME" at 2389,734 h77.5
LED10: tValues ">VALUE" at 2153,642 h77.5; tNames ">NAME" at 2152,734 h77.5
LED11: tValues ">VALUE" at 1917,642 h77.5; tNames ">NAME" at 1916,734 h77.5
LED12: tValues ">VALUE" at 1681,642 h77.5; tNames ">NAME" at 1680,734 h77.5
LED13: tValues ">VALUE" at 1445,642 h77.5; tNames ">NAME" at 1444,734 h77.5
LED14: tValues ">VALUE" at 1209,642 h77.5; tNames ">NAME" at 1208,734 h77.5
LED15: tValues ">VALUE" at 2626,878 h77.5; tNames ">NAME" at 2625,970 h77.5
LED16: tValues ">VALUE" at 2390,878 h77.5; tNames ">NAME" at 2389,970 h77.5
LED17: tValues ">VALUE" at 2153,878 h77.5; tNames ">NAME" at 2152,970 h77.5
LED18: tValues ">VALUE" at 1917,878 h77.5; tNames ">NAME" at 1916,970 h77.5
LED19: tValues ">VALUE" at 1681,878 h77.5; tNames ">NAME" at 1680,970 h77.5
LED20: tValues ">VALUE" at 1445,878 h77.5; tNames ">NAME" at 1444,970 h77.5
LED21: tValues ">VALUE" at 1209,878 h77.5; tNames ">NAME" at 1208,970 h77.5
LED22: tValues ">VALUE" at 2626,1114 h77.5; tNames ">NAME" at 2625,1206 h77.5
LED23: tValues ">VALUE" at 2390,1114 h77.5; tNames ">NAME" at 2389,1206 h77.5
LED24: tValues ">VALUE" at 2153,1114 h77.5; tNames ">NAME" at 2152,1206 h77.5
LED25: tValues ">VALUE" at 1917,1114 h77.5; tNames ">NAME" at 1916,1206 h77.5
LED26: tValues ">VALUE" at 1681,1114 h77.5; tNames ">NAME" at 1680,1206 h77.5
LED27: tValues ">VALUE" at 1445,1114 h77.5; tNames ">NAME" at 1444,1206 h77.5
LED28: tValues ">VALUE" at 1209,1114 h77.5; tNames ">NAME" at 1208,1206 h77.5
LED29: tValues ">VALUE" at 223,265 h77.5 r180; tNames ">NAME" at 223,115 h77.5 r180
LED30: tValues ">VALUE" at 581,261 h77.5 r180; tNames ">NAME" at 581,111 h77.5 r180
LED31: tValues ">VALUE" at 2550,503 h77.5 r270; tNames ">NAME" at 2700,503 h77.5 r270
LED32: tValues ">VALUE" at 1017,422 h77.5 r90; tNames ">NAME" at 867,422 h77.5 r90
R1: tValues ">VALUE" at 418,1535 h24.8 r180; tNames ">NAME" at 408,1447 h24.8 r180
R2: tValues ">VALUE" at 3594,1004 h24.8; tNames ">NAME" at 3604,1092 h24.8
R3: tValues ">VALUE" at 753,1346 h24.8 r180; tNames ">NAME" at 743,1258 h24.8 r180
R4: tValues ">VALUE" at 2995,638 h24.8; tNames ">NAME" at 3005,726 h24.8
R5: tValues ">VALUE" at 3256,1197 h24.8 r180; tNames ">NAME" at 3246,1109 h24.8 r180
R6: tValues ">VALUE" at 2924,575 h24.8; tNames ">NAME" at 2934,663 h24.8
R30: tValues ">VALUE" at 3598,1095 h24.8; tNames ">NAME" at 3608,1183 h24.8
R32: tValues ">VALUE" at 3191,139 h24.8; tNames ">NAME" at 3201,227 h24.8
R33: tValues ">VALUE" at 3631,178 h24.8 r90; tNames ">NAME" at 3543,188 h24.8 r90
R36: tValues ">VALUE" at 304,312 h24.8 r270; tNames ">NAME" at 392,302 h24.8 r270
R37: tValues ">VALUE" at 313,58 h24.8; tNames ">NAME" at 323,146 h24.8
R38: tValues ">VALUE" at 3350,1381 h24.8 r270; tNames ">NAME" at 3438,1371 h24.8 r270
R39: tValues ">VALUE" at 3189,220 h24.8; tNames ">NAME" at 3199,308 h24.8
R51: tValues ">VALUE" at 3170,555 h24.8 r180; tNames ">NAME" at 3160,467 h24.8 r180
R52: tValues ">VALUE" at 209,126 h24.8 r180; tNames ">NAME" at 199,38 h24.8 r180
R55: tValues ">VALUE" at 571,126 h24.8 r180; tNames ">NAME" at 561,38 h24.8 r180
SG1: tValues ">VALUE" at 3351,687 h37.2; tNames ">NAME" at 3376,907 h37.2
SV1: Top Overlay "5" at 871,1352 h77.5; Top Overlay "1" at 316,1352 h77.5; tValues ">VALUE" at 611,1442 h77.5; tNames ">NAME" at 361,1442 h77.5
SV3_LCD_HEADER: tNames "name" at 1181,1565 h77.5
SW1: tValues ">VALUE" at -11.98,546.98 h77.5 r270; tNames ">NAME" at 315,539.11 h77.5 r270
SW2: tValues ">VALUE" at 723.98,291.02 h77.5 r90; tNames ">NAME" at 397,298.89 h77.5 r90
SW3: tValues ">VALUE" at 2953.02,1106.02 h77.5; tNames ">NAME" at 2960.89,1433 h77.5
SW4: tValues ">VALUE" at 3291.02,232.02 h77.5; tNames ">NAME" at 3298.89,559 h77.5
T1: tValues ">VALUE" at 3747,1189 h77.5 r90; tNames ">NAME" at 3547,1189 h77.5 r90
U$2: tValues ">VALUE" at 3375,164 h24.8; tNames ">NAME" at 3375,194 h24.8
U$3: tValues ">VALUE" at 898,898 h62 r90; tNames ">NAME" at 527.82,898 h62 r90
U$4: tValues ">VALUE" at 2661,1031 h62 r270; tNames ">NAME" at 3031.18,1031 h62 r270